# Altium PCB MeasurePCB_Clone.PcbDoc
Units mm, origin at the board's own origin, x right, y up, seen from the top; angles counter-clockwise.
Board outline 87.38 x 98.81 mm, 2 copper layers (Top Layer, Bottom Layer); 72 components, 35 nets, 168 pads, 22 vias.
Unrouted connection lines stored in the file: 1.
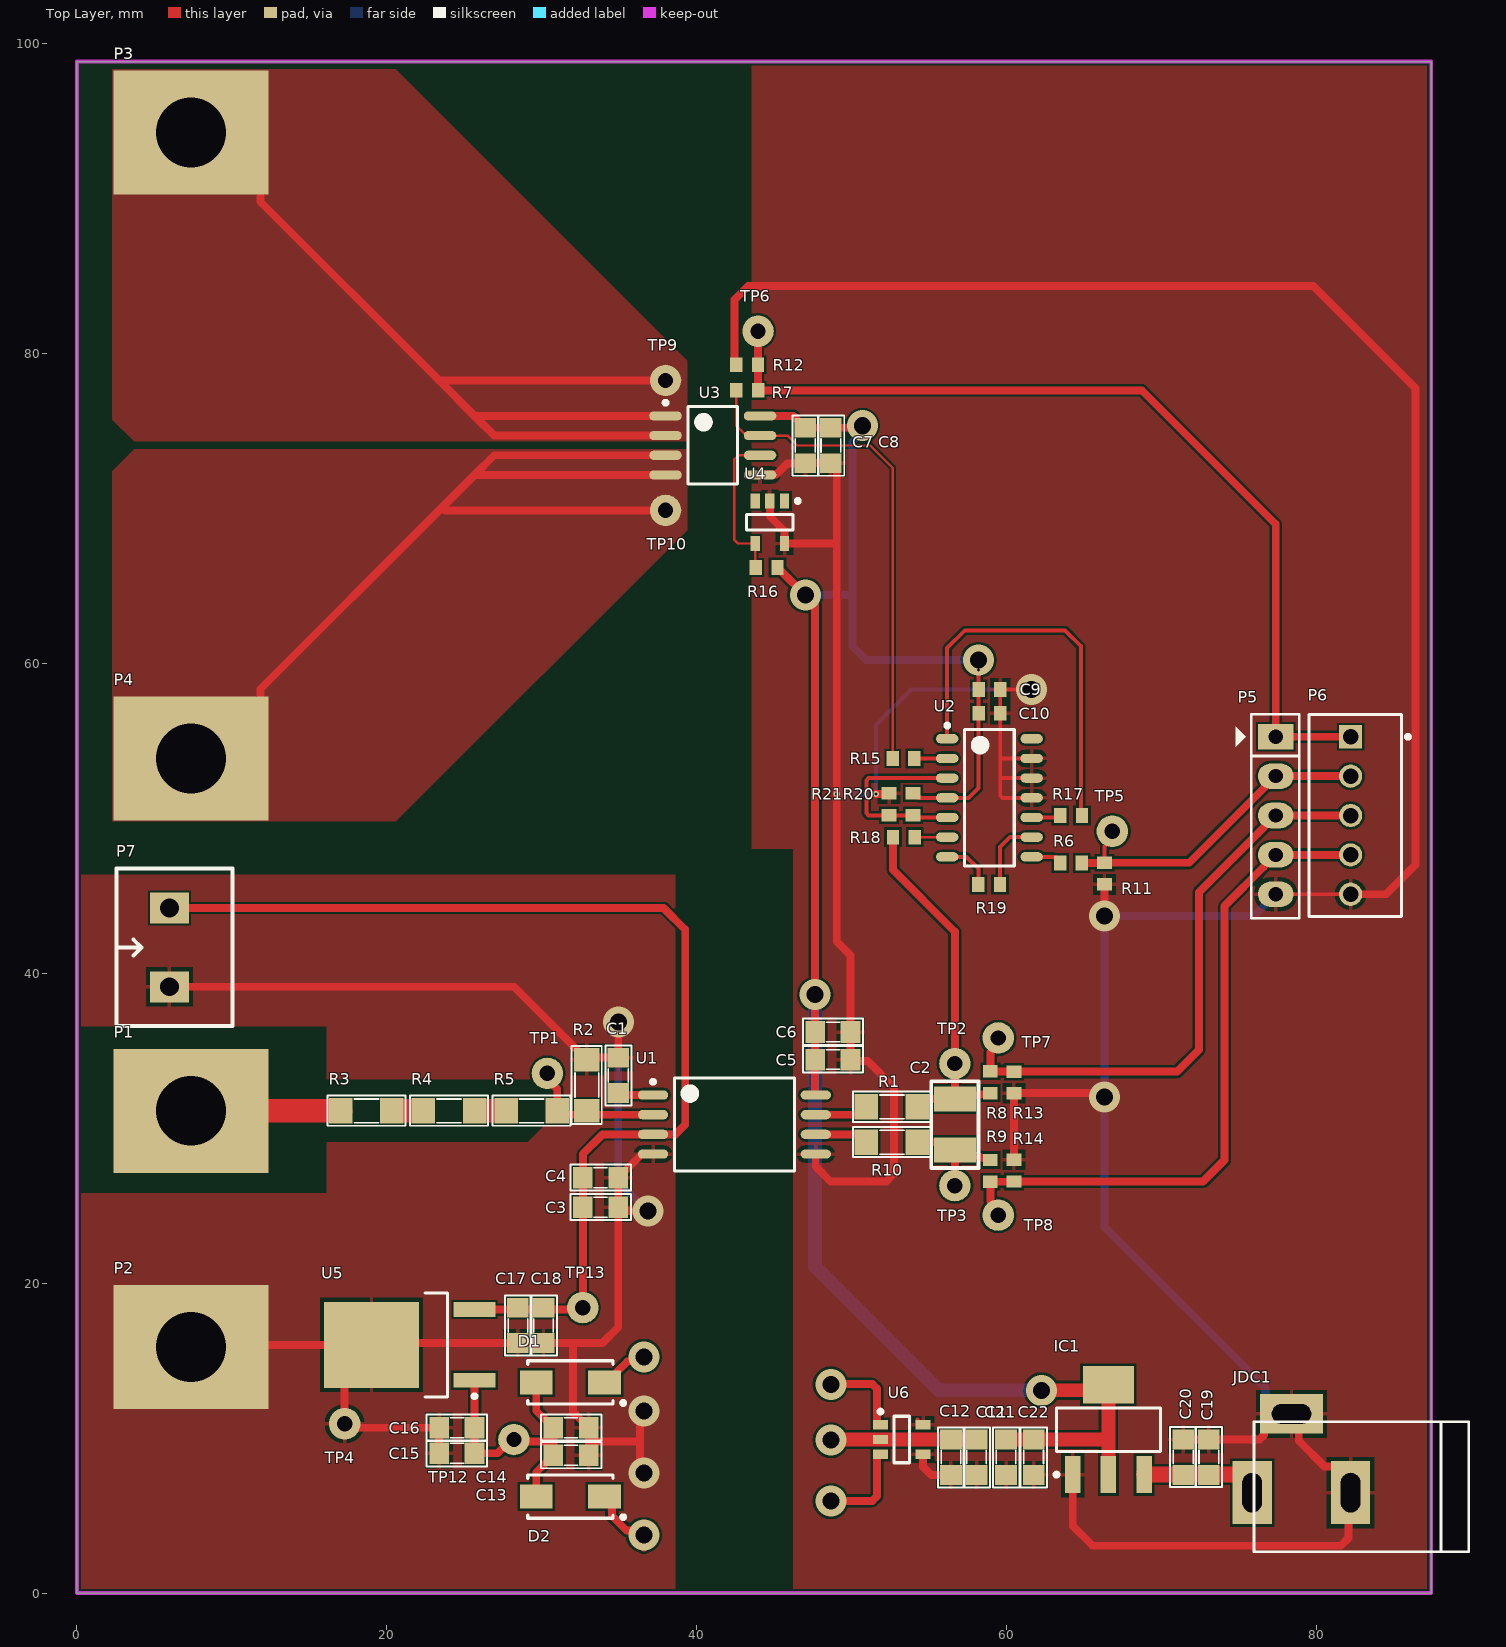
[diagram p0: Top Layer view]
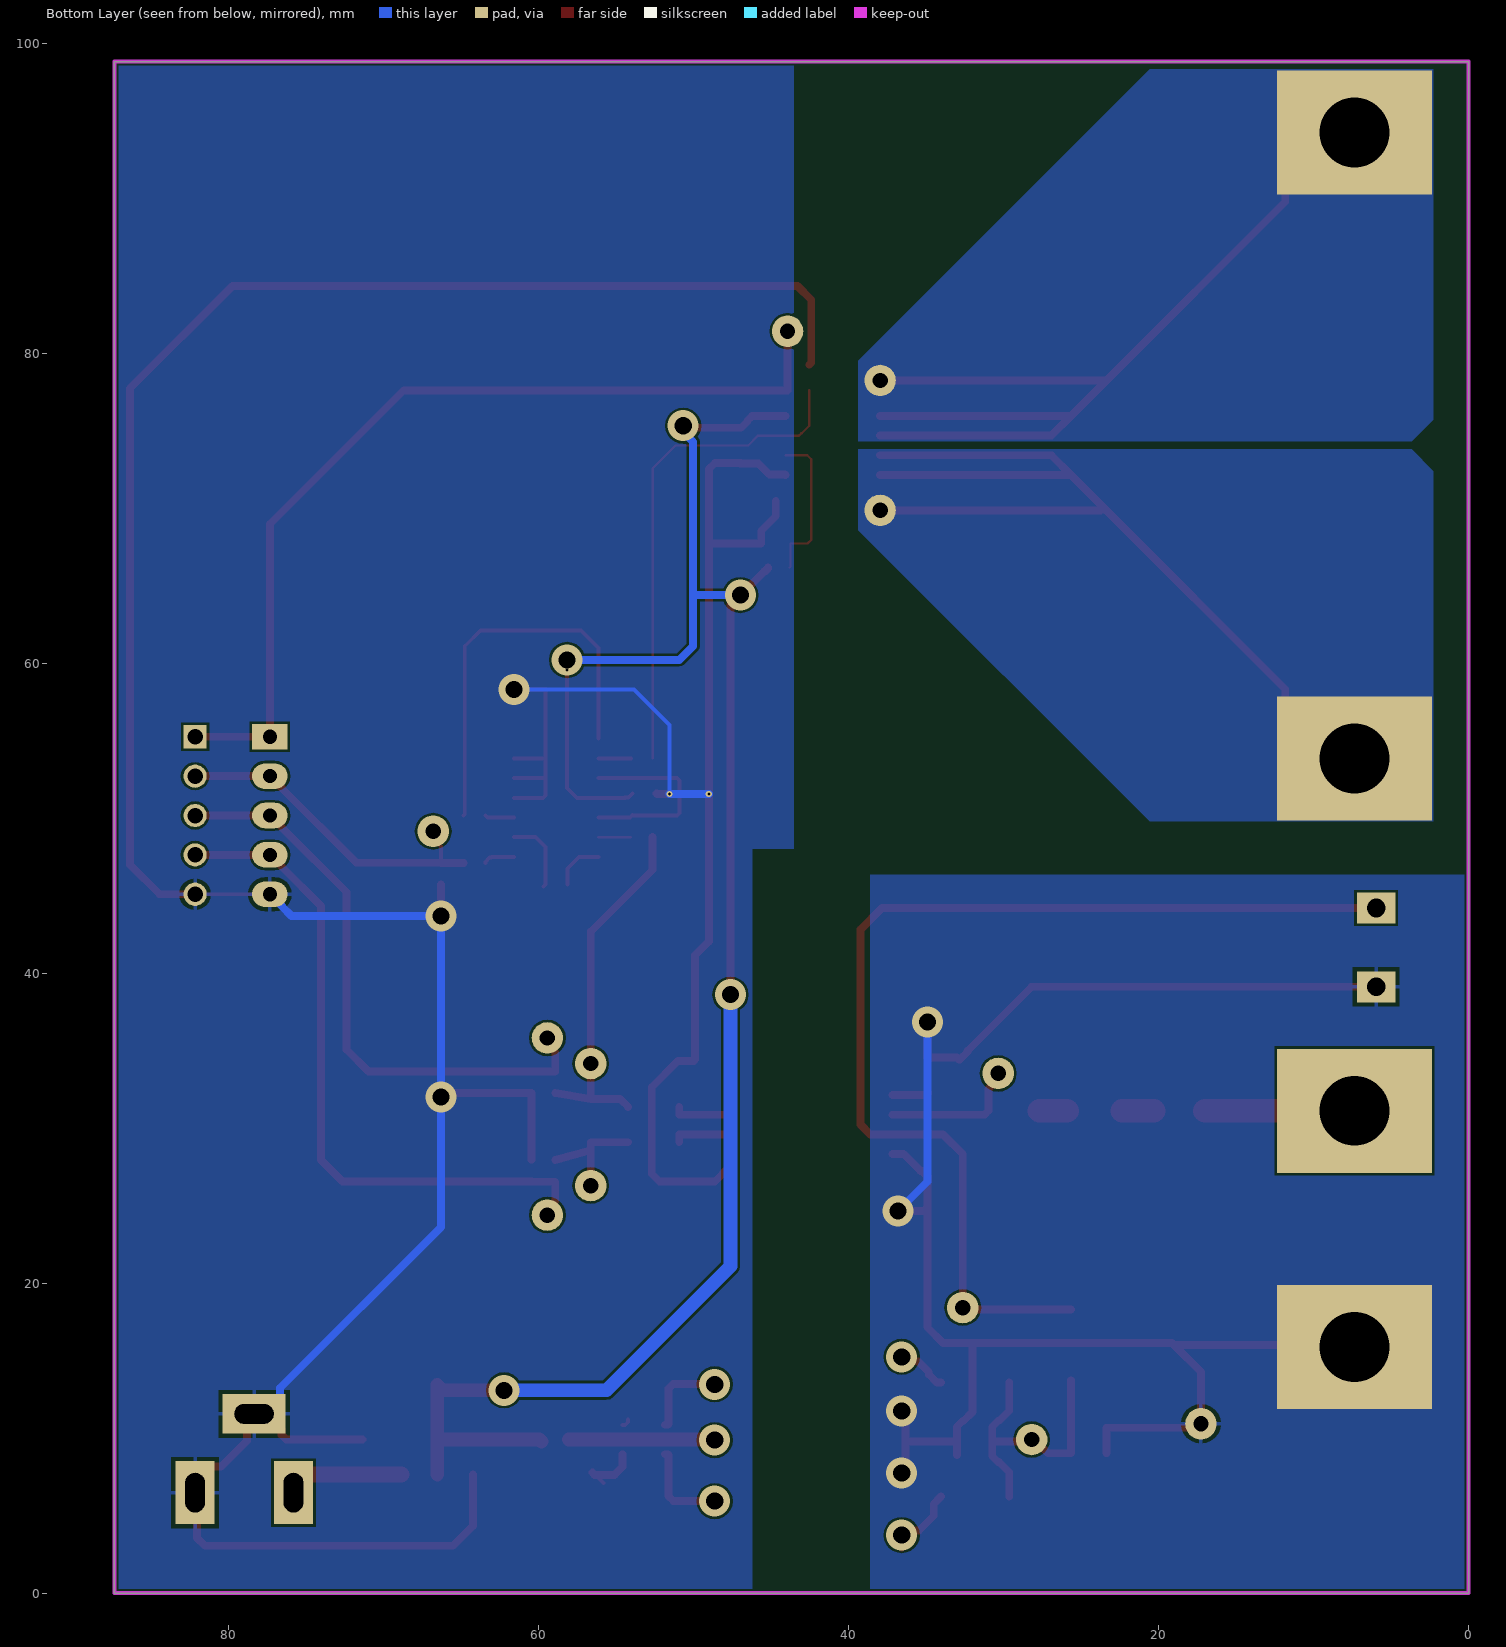
[diagram p1: Bottom Layer view, seen from below]
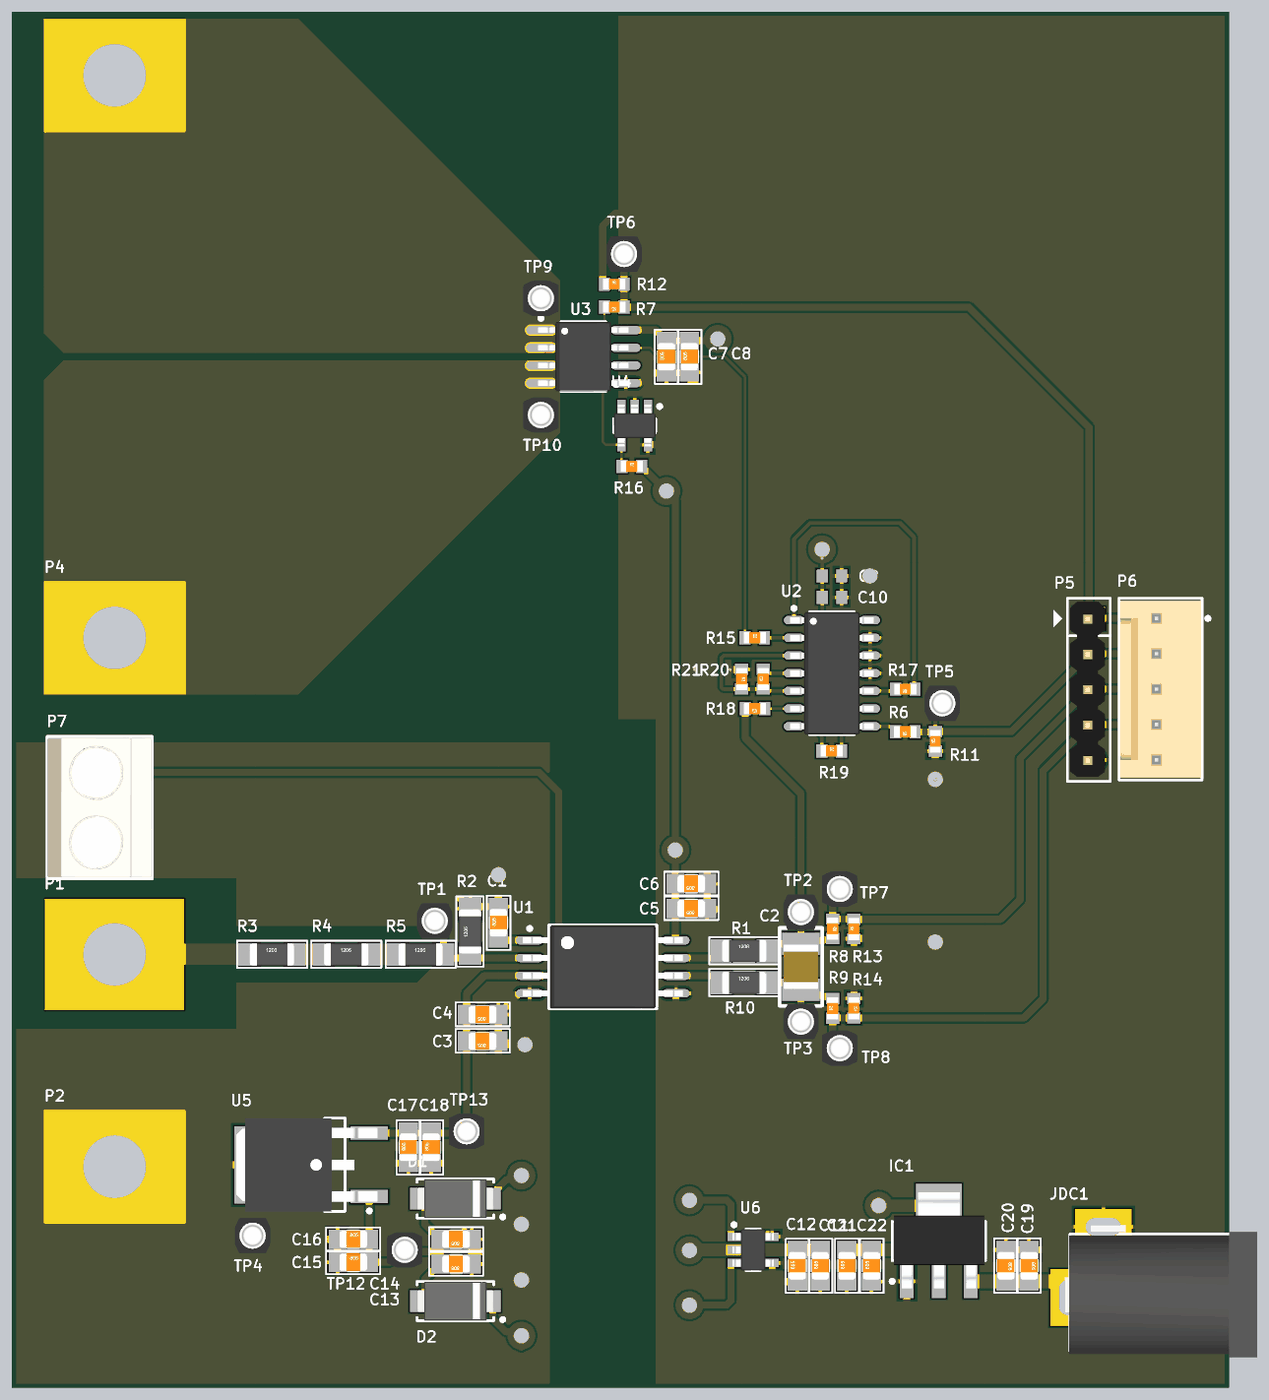
[diagram p2: 3D render of the assembled board from above, using the file's embedded part models]

## Layer stack, top to bottom
Top Solder: solder mask 0.0102, Solder Resist, Dk 3.5
Top Layer: signal copper 0.0356
Dielectric 1: dielectric 0.32, FR-4, Dk 4.8
Bottom Layer: signal copper 0.0356
Bottom Solder: solder mask 0.0102, Solder Resist, Dk 3.5

## Board outline
0,0 0,98.806 87.376,98.806 87.376,0

## Design rules (kind name [scope] priority, off if disabled: settings)
Clearance Clearance_AC [InNet('NetP1_1') vs InNet('NetP1_1')] p1: gap=0.508 ignorepadtopadclearanceinfootprint=FALSE
Clearance [All] p2: gap=0.152 ignorepadtopadclearanceinfootprint=FALSE
PolygonConnect [All] p1: thpad.connectstyle=Relief thpad.reliefconductorwidth=0.254 thpad.reliefentries=4 thpad.polygonreliefangle="90 Angle" thpad.airgapwidth=0.254 smdpad.connectstyle=Relief smdpad.reliefconductorwidth=0.254 smdpad.reliefentries=4 smdpad.polygonreliefangle="90 Angle" smdpad.airgapwidth=0.254 via.connectstyle=Direct via.reliefconductorwidth=0.254 via.reliefentries=4 via.polygonreliefangle="90 Angle" via.airgapwidth=0.254
RoutingVias [All] p1: holewidth=0.711 width=1.27 viastyle="Through Hole" minholewidth=0.2 minwidth=0.4 maxholewidth=0.711 maxwidth=1.27
SolderMaskExpansion SolderMaskExpansion_Via [IsVia] p1: expansion=0.102 istentingtop=TRUE
SolderMaskExpansion [All] p2: expansion=0.102 istentingtop=FALSE
Width [All] p1: maxlimit=2.54 minlimit=0.152 preferedwidth=0.381
30 further rules are at their usual default settings.

## Classes and differential pairs
component class 02_Power_Supply: C11 C12 C13 C14 C15 C16 C17 C18 C19 C20 C21 C22 D1 D2 IC1 JDC1 P7 TP12 TP13 U5 U6
component class 01_Measure: C1 C2 C3 C4 C5 C6 C7 C8 C9 C10 P1 P2 P3 P4 P5 P6 R1 R2 R3 R4 R5 R6 R7 R8 R9 R10 R11 R12 R13 R14 R15 R16 R17 R18 R19 R20 R21 TP1 TP2 TP3 TP4 TP5 TP6 TP7 TP8 TP9 TP10 U1 U2 U3 U4

## Components (designator, comment, footprint, x,y, rotation, side; value= is the part's Value field where it differs from the comment)
C1 "Cap Non-Pol SMD" CAP-SM-0805 34.925,32.258 r90 top value=0.22uF
C2 "Cap Non-Pol SMD" CAP-SM-1210 56.642,30.226 r90 top value=100uF
C3 "Cap Non-Pol SMD" CAP-SM-0805 34.925,24.892 r180 top value=10uF
C4 "Cap Non-Pol SMD" CAP-SM-0805 34.925,26.797 r180 top value=100nF
C5 "Cap Non-Pol SMD" CAP-SM-0805 49.911,34.417 r180 top value=100nF
C6 "Cap Non-Pol SMD" CAP-SM-0805 49.911,36.195 r180 top value=10uF
C7 "Cap Non-Pol SMD" CAP-SM-0805 46.99,72.898 r90 top value=100nF
C8 "Cap Non-Pol SMD" CAP-SM-0805 48.641,72.898 r90 top value=10uF
C9 "Cap Non-Pol SMD" CAP-SM-0603 58.87,58.293 r180 top value=10uF
C10 "Cap Non-Pol SMD" CAP-SM-0603 58.87,56.769 r0 top value=100nF
C11 "Cap Non-Pol SMD" CAP-SM-0805 58.039,7.62 r90 top value=1uF
C12 "Cap Non-Pol SMD" CAP-SM-0805 56.388,7.62 r90 top value=100nF
C13 "Cap Non-Pol SMD" CAP-SM-0805 33.02,8.89 r180 top value=10uF
C14 "Cap Non-Pol SMD" CAP-SM-0805 33.02,10.668 r180 top value=1uF
C15 "Cap Non-Pol SMD" CAP-SM-0805 23.368,9.017 r0 top value=1uF
C16 "Cap Non-Pol SMD" CAP-SM-0805 23.368,10.668 r0 top value=100nF
C17 "Cap Non-Pol SMD" CAP-SM-0805 28.448,16.129 r90 top value=1uF
C18 "Cap Non-Pol SMD" CAP-SM-0805 30.099,16.129 r90 top value=100nF
C19 "Cap Non-Pol SMD" CAP-SM-0805 73.025,9.906 r270 top value=1uF
C20 "Cap Non-Pol SMD" CAP-SM-0805 71.374,9.906 r270 top value=100nF
C21 "Cap Non-Pol SMD" CAP-SM-0805 59.944,7.62 r90 top value=1uF
C22 "Cap Non-Pol SMD" CAP-SM-0805 61.722,7.62 r90 top value=100nF
D1 "D Schottky" SS34 31.836,13.589 r180 top
D2 "D Schottky" SS34 31.836,6.223 r180 top
IC1 "ASM1117-5V" SOT223-4N 66.548,10.541 r90 top value=LM317
JDC1 "Jack DC" DC-IN 78.994,9.017 r180 top value="Jac DC"
P1 "TP" TP#1 7.366,31.115 r0 top
P2 "TP" TP#1 7.366,15.875 r0 top
P3 "TP" TP#1 7.366,94.234 r0 top
P4 "TP" TP#1 7.366,53.848 r0 top
P5 "Header 5" JP5 77.343,55.245 r270 top
P6 "61900511121" 61900511121 82.469,50.165 r90 top
P7 "Domino 2" "DOMINO 2- 5mm" 5.969,41.656 r90 top
R1 "RESISTOR SMD" RES-SM-1206 50.927,31.369 r0 top value=15
R2 "RESISTOR SMD" RES-SM-1206 32.893,31.115 r90 top value=111K
R3 "RESISTOR SMD" RES-SM-1206 17.018,31.115 r0 top value=1M
R4 "RESISTOR SMD" RES-SM-1206 22.352,31.115 r0 top value=1M
R5 "RESISTOR SMD" RES-SM-1206 27.686,31.115 r0 top value=1M
R6 "RESISTOR SMD" RES-SM-0603 64.823,47.097 r180 top value=10K
R7 "RESISTOR SMD" RES-SM-0603 43.931,77.597 r180 top value=10K
R8 "RESISTOR SMD" RES-SM-0603 58.928,33.644 r270 top value=10K
R9 "RESISTOR SMD" RES-SM-0603 58.928,26.554 r90 top value=10K
R10 "RESISTOR SMD" RES-SM-1206 50.927,29.083 r0 top value=15
R11 "RESISTOR SMD" RES-SM-0603 66.294,45.731 r90 top value=20K
R12 "RESISTOR SMD" RES-SM-0603 42.556,79.248 r0 top value=20K
R13 "RESISTOR SMD" RES-SM-0603 60.452,32.258 r90 top value=20K
R14 "RESISTOR SMD" RES-SM-0603 60.452,27.94 r270 top value=20K
R15 "RESISTOR SMD" RES-SM-0603 52.647,53.848 r0 top value=10K
R16 "RESISTOR SMD" RES-SM-0603 43.815,66.167 r0 top value=1K
R17 "RESISTOR SMD" RES-SM-0603 64.828,50.165 r180 top value=1K
R18 "RESISTOR SMD" RES-SM-0603 54.033,48.768 r180 top value=10K
R19 "RESISTOR SMD" RES-SM-0603 58.166,45.72 r0 top value=1K
R20 "RESISTOR SMD" RES-SM-0603 53.941,50.204 r90 top value=10K
R21 "RESISTOR SMD" RES-SM-0603 52.394,51.578 r270 top value=10K
TP1 "Test Point" TP#2 30.353,33.528 r0 top
TP2 "Test Point" TP#2 56.642,34.163 r0 top
TP3 "Test Point" TP#2 56.642,26.289 r0 top
TP4 "Test Point" TP#2 17.272,10.922 r0 top
TP5 "Test Point" TP#2 66.802,49.149 r0 top
TP6 "Test Point" TP#2 43.942,81.407 r0 top
TP7 "Test Point" TP#2 59.436,35.814 r90 top
TP8 "Test Point" TP#2 59.436,24.384 r90 top
TP9 "Test Point" TP#2 37.973,78.232 r90 top
TP10 "Test Point" TP#2 37.973,69.85 r90 top
TP12 "Test Point" TP#2 28.194,9.906 r90 top
TP13 "Test Point" TP#2 32.639,18.415 r90 top
U1 "ISO224ADWVR" SOIC127P1150X280-8N 42.418,30.226 r0 top
U2 "LM2902DR" SOIC127P600X175-14N 58.87,51.308 r0 top
U3 "TMCS1100" SOIC127P650X175-8N 41.021,74.041 r0 top
U4 "LM4030" SOT95P279X130-5N 44.704,69.088 r270 top
U5 "LM7812" DPAK228P1014X239-3N 21.454,16.008 r180 top
U6 "SN6501" SOT95P280X145-5N 53.213,9.906 r0 top

## Footprints (in the part's own frame and the unit in brackets; to place one, negate y for a bottom-side part, rotate by r counter-clockwise, add the part's x,y. Pads: shape width x height; smd on the part's side, far side on the other; paste and mask are expansions set on the pad)
61900511121 [mm] "2.54mm Male Locking Header, 5p"
  rect 1.5x1.5 hole 1: 1(5.08,0.3)
  round 1.5 hole 1: 2(2.54,0.3) 3(0,0.3) 4(-2.54,0.3) 5(-5.08,0.3)
  silkscreen extent -6.52,-3.52 6.52,2.98, body extent -6.35,-2.9 6.35,2.9, height 11.53
CAP-SM-0603 [mm] "SMD Ceramic Capacitor Size 0603"
  rect 0.8x0.95 smd: 1(-0.7,0) 2(0.7,0)
  body extent -0.85,-0.45 0.85,0.45, height 0.6
CAP-SM-0805 [mil]
  rect 50x55 smd: 1(0,0) 2(90,0)
  silkscreen extent -32,-34 121,33, body extent 6,-25 84,25, height 31
CAP-SM-1210 [mil]
  rect 63x106 smd: 1(-65,0) 2(65,0)
  silkscreen extent -110,-60 110,60, body extent -63,-49 63,49, height 51
DC-IN [mil] "Jac DC input"
  rect 100x160 hole 50 slot 100 at 90 deg: 1(125,100) 2(-125,100)
  rect 160x100 hole 50 slot 100 at 0 deg: 3(25,-100)
  silkscreen extent -425,-80 120,250, body extent -410,-105 134,269, height 434
"DOMINO 2- 5mm" [mm]
  rect 2x2.5 hole 1.2: 1(-2.54,0) 2(2.54,0)
  silkscreen extent -5.08,-4.08 5.08,3.43, body extent -5,-4.07 5,3.43, height 10
DPAK228P1014X239-3N [mm] "D-PAK, 3-Pads, Body 6.21x6.72mm (max), IPC Medium Density"
  rect 2.7x0.95 smd: 1(-4.2,2.28) 3(-4.2,-2.28)
  rect 6.1x5.55 smd: 2(2.45,0)
  silkscreen extent -4.33,-3.35 -1,3.43, body extent -4.79,-3.35 5.35,3.35, height 2.39
JP5 [mil] "JP5"
  rect 65x90 hole 36: 1(0,0)
  oval 65x90 hole 36: 2(100,0) 3(200,0) 4(300,0) 5(400,0)
  silkscreen extent -57,-101 461,60, body extent -48,-53 448,45, height 323
RES-SM-0603 [mm]
  rect 0.8x0.95 smd: 1(-0.014,0) 2(1.386,0)
  body extent -0.11,-0.4 1.49,0.4, height 0.3
RES-SM-1206 [mil]
  rect 60x65 smd: 1(0,0) 2(130,0)
  silkscreen extent -34,-38 164,39, body extent 2,-31 128,32, height 40
SOIC127P600X175-14N [mm] "SOIC, 14-Leads, Body 8.65x3.90mm, Pitch 1.27mm, IPC Medium Density"
  oval 1.45x0.6 smd: 1(-2.725,3.81) 2(-2.725,2.54) 3(-2.725,1.27) 4(-2.725,0) 5(-2.725,-1.27) 6(-2.725,-2.54) 7(-2.725,-3.81) 8(2.725,-3.81) 9(2.725,-2.54) 10(2.725,-1.27) 11(2.725,0) 12(2.725,1.27) 13(2.725,2.54) 14(2.725,3.81)
  silkscreen extent -2.85,-4.4 1.6,4.78, body extent -3,-4.4 3,4.4, height 1.75
SOIC127P650X175-8N [mm] "SOIC, 8-Leads, Body 4.91x3.90mm, Pitch 1.27mm, IPC Medium Density"
  oval 2.1x0.6 smd: 1(-3.05,1.905) 2(-3.05,0.635) 3(-3.05,-0.635) 4(-3.05,-1.905) 5(3.05,-1.905) 6(3.05,-0.635) 7(3.05,0.635) 8(3.05,1.905)
  silkscreen extent -3.17,-2.5 1.6,2.88, body extent -3.25,-2.5 3.25,2.5, height 1.75
SOIC127P1150X280-8N [mm] "SOIC, 8-Leads, Body 5.85x7.50mm, Pitch 1.27mm, IPC Medium Density"
  oval 1.95x0.6 smd: 1(-5.25,1.905) 2(-5.25,0.635) 3(-5.25,-0.635) 4(-5.25,-1.905) 5(5.25,-1.905) 6(5.25,-0.635) 7(5.25,0.635) 8(5.25,1.905)
  silkscreen extent -5.37,-3 3.88,3, body extent -5.75,-3 5.75,3, height 2.8
SOT95P279X130-5N [mm] "SOT23, 5-Leads, Body 2.85x2.79mm, Pitch 0.95mm, IPC Medium Density"
  rect 0.95x0.6 smd: 1(-1.375,0.95) 2(-1.375,0) 3(-1.375,-0.95) 4(1.375,-0.95) 5(1.375,0.95)
  silkscreen extent -1.5,-1.5 0.5,1.93, body extent -1.5,-1.5 1.5,1.5, height 1.3
SOT95P280X145-5N [mm] "SOT23, 5-Leads, Body 2.88x2.80mm, Pitch 0.95mm, IPC Medium Density"
  rect 0.95x0.6 smd: 1(-1.375,0.95) 2(-1.375,0) 3(-1.375,-0.95) 4(1.375,-0.95) 5(1.375,0.95)
  silkscreen extent -1.5,-1.5 0.5,1.92, body extent -1.5,-1.5 1.5,1.5, height 1.45
SOT223-4N [mm] "SOT223, 4-Leads, Body 6.5x3.5mm, Pitch 2.3mm, Lead Span 7mm, IPC Medium Density"
  rect 2.4x1 smd: 1(-2.9,2.3) 2(-2.9,0) 3(-2.9,-2.3)
  rect 2.4x3.3 smd: 4(2.9,0)
  silkscreen extent -3.02,-3.35 1.4,3.47, body extent -3.39,-3.27 3.5,3.23, height 1.72
SS34 [mm] "DO-214-AC/SMA Molded Diode, Body 5.3x2.6mm, IPC Medium Density"
  rect 2.1x1.55 smd: 1(-2.2,0) 2(2.2,0)
  silkscreen extent -3.53,-1.4 2.75,1.45, body extent -2.75,-1.4 2.75,1.4, height 2.3
TP#1 [mm]
  rect 10x8 hole 4.5: 1(0,0)
TP#2 [mm] "Connect 1"
  round 2.032 hole 0.991: TP1(0,0)
  body extent -1.27,-1.27 1.27,1.27, height 4.53

## Part data
C1 C2 C3 C4 C5 C6 C7 C8 C9 C10 C11 C12 C13 C14 C15 C16 C17 C18 C19 C20 C21 C22: "Capacitor"
D1 D2: "Schottky Diode", Code_JEDEC=DO-214-AA, LatestRevisionDate=17-Jul-2002, LatestRevisionNote="Re-released for DXP Platform.", PackageDescription="DO-214-AA/SMB; 2 C-Bend Leads; Body 5.3 x 3.6 mm, inc. leads (LxW)", PackageReference=SMB, Published=8-Jun-2000, Publisher="Altium Limited"
IC1: library part LM1117, "Available in 1.8V, 2.5V, 2.85V, 3.3V, 5V, and  Adjustable Versions"
JDC1: "Jack DC input"
P5: "Header, 5-Pin", LatestRevisionDate=17-Jul-2002, LatestRevisionNote="Re-released for DXP Platform.", Publisher="Altium Limited"
P6: "WR-WTB THT Male Vertical Locking Header, pitch 2.54mm, 5p", Contact Resistance=20mOhm, Operating Temperature="-40 to +105degC", Rated Current=3A, Withstanding Voltage=1000VAC, Working Voltage=250VAC, ComponentLink1Description=Manufacturer, ComponentLink1URL=http://www.we-online.de, ComponentLink2Description=Datasheet, ComponentLink2URL=https://www.we-online.com/catalog/datasheet/61900511121.pdf, Gender=Male, Mounting Technology=THT, Packaging=Bag, Part Number=61900511121, Pin Number=5, Pitch=2.54mm, Published Date="January 2020", Publisher="Wurth Elektronik", Type=Vertical
P7: "Domino, 2-Pin", LatestRevisionDate=17-Jul-2002, LatestRevisionNote="Re-released for DXP Platform.", Publisher="Altium Limited"
R1 R2 R3 R4 R5 R6 R7 R8 R9 R10 R11 R12 R13 R14 R15 R16 R17 R18 R19 R20 R21: "Resistor"
U1: Manufacturer="Texas Instruments", Manufacturer P/N=ISO224ADWV, ComponentLink1Description="Supplier 1 Link", ComponentLink1URL=https://www.mouser.vn/ProductDetail/Texas-Instruments/ISO224ADWV?qs=%252BEew9%252B0nqrAIOtaYYgHDyw%3D%3D, Supplier 1=Mouser, Supplier 1 P/N=595-ISO224ADWV
U3: Manufacturer="Texas Instruments", Manufacturer P/N=TMCS1100A1QD, ComponentLink1Description="Supplier 1 Link", ComponentLink1URL=https://www.mouser.vn/ProductDetail/Texas-Instruments/TMCS1100A1QDR?qs=sPbYRqrBIVm7HRwTfsNKdw%3D%3D, Supplier 1=Mouser, Supplier 1 P/N=595-TMCS1100A1QDR
U4: Manufacturer="Texas Instruments", Manufacturer P/N=LM4030BMF-2.5/NOPB, ComponentLink1Description="Supplier 1 Link", ComponentLink1URL=https://www.mouser.vn/ProductDetail/Texas-Instruments/LM4030BMF-25-NOPB?qs=QbsRYf82W3GjKEoF5S%2FJEg%3D%3D, Supplier 1=Mouser, Supplier 1 P/N=926-LM4030BMF25NOPB
U5: library part LM78xx
P1 P2 P3 P4: ComponentLink1Description="Supplier 1 Link"

## Via types
v1: diameter 2, hole 1.1, Top Layer to Bottom Layer, tented both sides, 18 vias
v2: diameter 0.4, hole 0.2, Top Layer to Bottom Layer, tented both sides, 3 vias
v3: diameter 0.45, hole 0.2, Top Layer to Bottom Layer, tented both sides, 1 vias

## Nets (pads, with @x,y where several pads share a name; then routed paths per layer and width w, separated by ;. In a path a pad name is that pad's centre, name@x,y a point inside that pad or via, vN(x,y) a via of type N, cw(c..) or ccw(c..) an arc to the next point about the centre after c; other vN are vias at no path point)
2.5+: R20.1 R21.2 U2.3 U2.5 | length 14.3
  Top Layer w0.152: R21.2 R20.1@53.941,50.192
  Top Layer w0.254: U2.5 54.093,50.038 R20.1 53.916,50.165 51.076,50.165 50.927,50.314 50.927,52.429 51.076,52.578 U2.3
+5: C5.2 C6.2 C7.2 C8.2 C9.2 C10.1 C11.2 C12.2 C21.2 C22.2 IC1.2 IC1.4 R16.2 R20.2 U1.8 U2.4 U3.8 U6.2 | length 141.3
  Top Layer w0.254: R20.2 54.214,51.317 54.429,51.317 54.438,51.308 U2.4 57.531,51.308 58.17,51.947 C9.2 58.17,59.559 v2(58.166,59.563)
  Top Layer w0.508: U3.8 46.228,75.946 46.545,75.629 46.545,75.565 46.926,75.184 C7.2 C8.2 v1@50.038,75.184 ; R16.2 45.201,66.092 45.347,65.946 45.422,65.946 46.979,64.389 46.984,64.389 v1(46.99,64.389) 47.625,63.754 47.625,37.973 C6.2 C5.2 47.625,32.173 U1.8
  Top Layer w0.889: v1@48.641,9.906 U6.2 C12.2 C11.2 ; C21.2@59.817,9.779 C21.2 C22.2 66.548,9.906 ; v1(62.23,13.081) 66.188,13.081 IC1.4 66.548,9.906 ; IC1.2 66.548,9.906
  Bottom Layer w0.254: 49.953,64.601 50.038,64.516
  Bottom Layer w0.508: v1@46.984,64.389 50.038,64.389 ; v1(50.673,75.311) 50.673,74.907 50.038,74.272 50.038,64.516 50.038,64.389 ; v2(58.166,59.563) 57.531,60.198 50.927,60.198 50.038,61.087 50.038,64.389
  Bottom Layer w0.889: v1@47.625,37.973 47.625,21.082 55.626,13.081 v1(62.23,13.081)
  other v1: 48.641,9.865 47.625,38.608 58.166,60.198
+12A: C3.2 C4.2 C17.2 C18.2 P7.2 TP13.TP1 U1.3 U5.3 | length 70.8
  Top Layer w0.508: P7.2 37.846,44.196 39.243,42.799 39.243,30.226 38.608,29.591 U1.3 33.909,29.591 32.639,28.321 C4.2 C3.2 TP13.TP1 32.512,18.288 30.099,18.288 28.448,18.288 U5.3
+17.5: C13.2 C14.2 C15.2 C16.2 D1.2 D2.2 TP12.TP1 U5.1 | length 18.6
  Top Layer w0.508: U5.1 C16.2 C15.2 27.134,9.017 28.023,9.906 TP12.TP1 28.321,9.779 30.734,9.779 ; D2.2 29.636,7.792 30.29,8.445 30.353,8.445 30.734,8.826 C13.2 30.734,9.779 ; D1.2 29.636,11.766 30.29,11.112 30.353,11.112 30.734,10.731 C14.2 30.734,9.779
CURRENT: R17.1 U2.1 | length 26.3
  Top Layer w0.254: U2.1 56.145,60.971 57.277,62.103 63.754,62.103 64.77,61.087 64.77,50.237 R17.1
GND: C5.1 C6.1 C7.1 C8.1 C9.1 C10.2 C11.1 C12.1 C19.1 C20.1 C21.1 C22.1 IC1.1 JDC1.2 JDC1.3 P5.5 P6.5 R11.1 R12.1 R13.1 R14.1 R21.1 U1.5 U2.11 U2.12 U2.13 U3.5 U4.2 U4.5 U6.4 U6.5 | length 295.8
  Top Layer w0.254: 54.24,11.204 54.24,11.029 54.413,10.856 U6.5 ; C12.1@55.816,7.112 56.325,7.62 C12.1 ; v1@60.833,58.293 C9.1 59.57,53.848 ; U2.11 59.719,51.308 59.57,51.457 59.57,52.578 ; U2.12 59.57,52.578 ; U2.13 59.57,53.848 ; P5.5 P6.5 ; 59.57,52.578 59.57,53.848
  Top Layer w0.508: R12.1 42.418,79.372 42.418,83.439 43.307,84.328 79.756,84.328 86.36,77.724 86.36,46.99 84.455,45.085 P6.5 ; U3.5 44.089,72.154 45.103,72.154 45.827,72.878 46.97,72.878 C7.1 C8.1 49.022,72.517 49.022,67.713 ; U4.2 44.704,69.469 45.639,68.534 45.639,67.728 U4.5 49.022,67.713 ; U1.5 47.668,27.516 48.641,26.543 52.197,26.543 52.705,27.051 52.705,32.639 51.01,34.334 49.994,34.334 C5.1 C6.1 49.911,41.148 49.022,42.037 v2(49.022,51.562) 49.022,67.713 ; v2(51.562,51.562) 52.364,51.562 R21.1 ; U6.4 54.588,8.15 55.118,7.62 C12.1@56.325,7.62 ; C12.1 C12.1@56.536,7.768 ; R14.1 R13.1 60.466,32.258 66.04,32.258 v1(66.294,32.004) ; IC1.1 64.248,4.332 65.532,3.048 81.534,3.048 82.042,3.556 82.042,6.35 JDC1.2 82.169,7.143 81.153,8.159 80.487,8.159 78.823,9.823 78.823,11.093 JDC1.3 77.597,11.557 76.581,10.541 76.581,10.204 76.283,9.906 C19.1 C20.1 ; v3(66.294,43.688) R11.1
  Bottom Layer w0.254: v2(51.562,51.562) 51.562,56.007 53.848,58.293 v1@60.833,58.293
  Bottom Layer w0.508: v2(49.022,51.562) v2(51.562,51.562) ; P5.5 77.335,45.085 76.57,44.32 76.57,44.312 75.946,43.688 v3(66.294,43.688) 66.294,32.385 v1(66.294,32.004) 66.294,32.131 66.294,23.622 76.677,13.239 76.677,12.573 77.693,11.557 JDC1.3
  other v1: 66.294,32.004 66.294,43.688 61.595,58.293
GND_A12+: C1.2 C3.1 C4.1 C13.1 C14.1 C15.1 C16.1 C17.1 C18.1 P2.1 P7.1 R2.2 TP4.TP1 U1.4 U5.2 | length 117.8
  Top Layer w0.508: P7.1 28.194,39.116 32.322,34.989 32.322,34.925 32.829,34.417 R2.2 33.02,34.544 C1.2 v1(34.925,36.83) ; P2.1 7.499,16.008 U5.2 ; C15.1 C16.1 17.526,10.668 TP4.TP1 17.272,14.276 U5.2 ; C13.1 33.02,9.779 ; v1(36.576,7.74) 36.322,7.994 36.322,9.779 ; v1(36.576,11.74) 36.322,11.486 36.322,9.779 ; v1(36.83,24.638) 35.179,24.638 C3.1 ; U1.4 36.468,28.321 36.422,28.275 36.403,28.275 35.369,27.241 35.306,27.241 34.925,26.86 C4.1 C3.1 ; U5.2 19.125,16.129 C17.1 C18.1 32.004,16.129 ; 32.004,16.129 33.909,16.129 34.925,17.145 34.925,24.638 C3.1 ; 32.004,16.129 32.004,11.684 32.575,11.112 32.639,11.112 33.02,10.731 C14.1 33.02,9.779 ; 33.02,9.779 36.322,9.779
  Bottom Layer w0.508: v1(34.925,36.83) 34.925,26.543 v1(36.83,24.638)
IN+: P3.1 TP9.TP1 U3.1 U3.2 | length 66.2
  Top Layer w0.508: P3.1 8.084,94.234 11.83,90.488 11.83,89.77 23.368,78.232 ; TP9.TP1@37.846,78.105 TP9.TP1 23.368,78.232 ; U3.2 26.924,74.676 25.654,75.946 ; U3.1 25.654,75.946 ; 23.368,78.232 25.654,75.946
IN-: P4.1 TP10.TP1 U3.3 U3.4 | length 65.9
  Top Layer w0.508: P4.1 8.084,53.848 11.83,57.594 11.83,58.312 23.558,70.04 ; U3.4 25.654,72.136 ; U3.3 26.924,73.406 25.654,72.136 ; TP10.TP1 23.749,69.85 23.558,70.04 ; 23.558,70.04 25.654,72.136
NetC1_1: C1.1 U1.1 | length 2.3
  Top Layer w0.508: C1.1 35.052,32.131 U1.1
NetC2_1: C2.1 R9.2 R10.2 TP3.TP1 | length 7.6
  Top Layer w0.508: R10.2 56.642,29.083 C2.1 ; TP3.TP1 C2.1 ; R9.2 C2.1
NetC2_2: C2.2 R1.2 R8.2 R18.2 TP2.TP1 | length 23.5
  Top Layer w0.508: R18.2 52.647,46.667 56.642,42.672 TP2.TP1 C2.2 ; R1.2 54.737,31.877 C2.2 ; R8.2 C2.2
NetC19_2: C19.2 C20.2 IC1.3 JDC1.1 | length 7.5
  Top Layer w0.381: JDC1.1@74.739,7.641 75.819,6.562 JDC1.1
  Top Layer w1.016: IC1.3 JDC1.1@74.739,7.641
NetD1_1: D1.1 | length 3.3
  Top Layer w0.508: D1.1 34.311,13.589 34.832,14.11 34.832,14.258 35.529,14.955 36.291,14.955 v1(36.576,15.24)
NetD2_1: D2.1 | length 4.6
  Top Layer w0.508: D2.1 34.513,5.746 34.513,4.984 35.472,4.025 35.887,4.025 36.166,3.746 36.166,3.331 v1@36.576,2.921
  other v1: 36.576,3.74
NetL1_1: U6.3 | length 6.3
  Top Layer w0.508: v1@48.387,5.95 51.319,5.95 51.617,6.248 51.617,8.91 51.663,8.956 U6.3
  other v1: 48.641,5.928
NetL1_3: U6.1 | length 5.9
  Top Layer w0.508: v1@48.387,13.484 51.319,13.484 51.617,13.186 51.617,10.902 51.663,10.856 U6.1
  other v1: 48.641,13.462
NetP1_1: P1.1 R3.1 | length 9.7
  Top Layer w1.524: P1.1 R3.1
NetP5_1: P5.1 P6.1 R7.1 R12.2 TP6.TP1 | length 59.3
  Top Layer w0.508: TP6.TP1 R12.2 43.942,77.6 R7.1 68.707,77.597 77.343,68.961 P5.1 P6.1
NetP5_2: P5.2 P6.2 R6.1 R11.2 TP5.TP1 | length 21.9
  Top Layer w0.254: R11.2 66.294,48.16 66.802,48.668 TP5.TP1
  Top Layer w0.508: R6.1 66.274,47.097 R11.2 71.755,47.117 76.57,51.932 76.57,51.94 77.335,52.705 P5.2 P6.2
NetP5_3: P5.3 P6.3 R8.1 R13.2 TP7.TP1 | length 38.4
  Top Layer w0.508: TP7.TP1 59.436,35.402 58.928,34.894 R8.1 60.438,33.658 R13.2 70.982,33.644 72.39,35.052 72.39,45.212 76.57,49.392 76.57,49.4 77.335,50.165 P5.3 P6.3
NetP5_4: P5.4 P6.4 R9.1 R14.2 TP8.TP1 | length 43.9
  Top Layer w0.508: TP8.TP1 59.436,24.796 58.928,25.304 R9.1 R14.2 72.655,26.554 74.041,27.94 74.041,44.323 76.57,46.852 76.57,46.86 77.335,47.625 P5.4 P6.4
NetR2_1: R2.1 R5.2 TP1.TP1 U1.2 | length 9
  Top Layer w0.508: TP1.TP1 30.353,33.161 30.988,32.526 R5.2 31.242,30.861 U1.2
NetR3_2: R3.2 R4.1 | length 2
  Top Layer w1.524: R3.2 R4.1
NetR4_2: R4.2 R5.1 | length 1.8
  Top Layer w1.524: R4.2@25.908,31.115 R5.1
NetR7_2: R7.2 R15.1 U3.7 | length 32.2
  Top Layer w0.152: R7.2 42.545,75.311 43.029,74.827 43.049,74.827 43.2,74.676 U3.7 45.841,74.676 46.476,74.041 51.181,74.041 52.633,72.589 R15.1
NetR15_2: R15.2 U2.2 | length 2.1
  Top Layer w0.254: R15.2 U2.2
NetR17_2: R17.2 U2.10 | length 1.9
  Top Layer w0.254: U2.10 63.315,50.038 R17.2
NetR18_1: R18.1 U2.6 | length 2.1
  Top Layer w0.152: R18.1 U2.6
NetR19_2: R19.2 U2.9 | length 4.9
  Top Layer w0.254: R19.2@59.679,45.593 R19.2 59.552,48.122 60.198,48.768 U2.9
OUT_N: R10.1 U1.6 | length 3.8
  Top Layer w0.508: U1.6 50.927,29.591 R10.1
OUT_P: R1.1 U1.7 | length 3.8
  Top Layer w0.508: U1.7 50.927,30.861 R1.1
PHASE_CAL: R6.2 U2.8 | length 2.1
  Top Layer w0.254: U2.8 63.016,47.498 63.068,47.445 63.164,47.445 63.437,47.172 R6.2
VOLTAGE: R19.1 U2.7 | length 3.3
  Top Layer w0.254: U2.7 57.404,47.498 58.152,46.75 R19.1
VREF_TMCS: R16.1 U3.6 U4.4 | length 10
  Top Layer w0.152: R16.1 43.754,66.214 U4.4 42.65,67.713 42.418,67.945 42.418,73.152 42.672,73.406 U3.6
pads on no net: U2.14 U4.1 U4.3

## Polygon pours and split planes (outlines as drawn)
GND_A12+ on Top Layer "GND_A12+_L01_P006" (solid, remove dead copper, pour order 6): 0,0 0,98.806 87.376,98.806 87.376,0
GND on Top Layer "GND_L01_P004" (solid, remove dead copper, pour order 4): 0,0 0,98.806 87.376,98.806 87.376,0
IN- on Top Layer "IN-_L01_P000" (solid, remove dead copper, pour order 0): 20.574,49.784 39.37,68.58 39.37,73.787 3.683,73.787 2.286,72.39 2.286,49.784
IN+ on Top Layer "IN+_L01_P001" (solid, remove dead copper, pour order 1): 20.574,98.298 39.37,79.502 39.37,74.295 3.683,74.295 2.286,75.692 2.286,98.298
GND_A12+ on Bottom Layer "GND_A12+_L02_P007" (solid, remove dead copper, pour order 7): 0,0 0,98.806 87.376,98.806 87.376,0
GND on Bottom Layer "GND_L02_P005" (solid, remove dead copper, pour order 5): 0,0 0,98.806 87.376,98.806 87.376,0
IN- on Bottom Layer "IN-_L02_P002" (solid, remove dead copper, pour order 2): 20.574,49.784 39.37,68.58 39.37,73.787 3.683,73.787 2.286,72.39 2.286,49.784
IN+ on Bottom Layer "IN+_L02_P003" (solid, remove dead copper, pour order 3): 20.574,98.298 39.37,79.502 39.37,74.295 3.683,74.295 2.286,75.692 2.286,98.298

## Keep-outs
Keep-Out Layer:
  the board outline again, w0.254

## Other copper
Top Layer:
  pour cut-out: 16.104,33.147 29.083,33.147 30.226,32.004 30.226,30.226 29.083,29.083 16.104,29.083 16.104,25.781 0,25.781 0,36.576 16.104,36.576
  pour cut-out: 38.608,46.355 0,46.355 0,48.006 39.624,48.006 39.624,98.806 43.528,98.806 43.528,48.006 46.228,48.006 46.228,0 38.608,0
Bottom Layer:
  pour cut-out: 38.608,46.355 0,46.355 0,48.006 39.624,48.006 39.624,98.806 43.529,98.806 43.529,48.006 46.228,48.006 46.228,0 38.608,0